# Altium PCB PCB1.PcbDoc
Units mil, origin at the board's own origin, x right, y up, seen from the top; angles counter-clockwise.
Board outline 6000 x 4000 mil, 2 copper layers (Top Layer, Bottom Layer); 6 components, 8 nets, 49 pads, 0 vias.
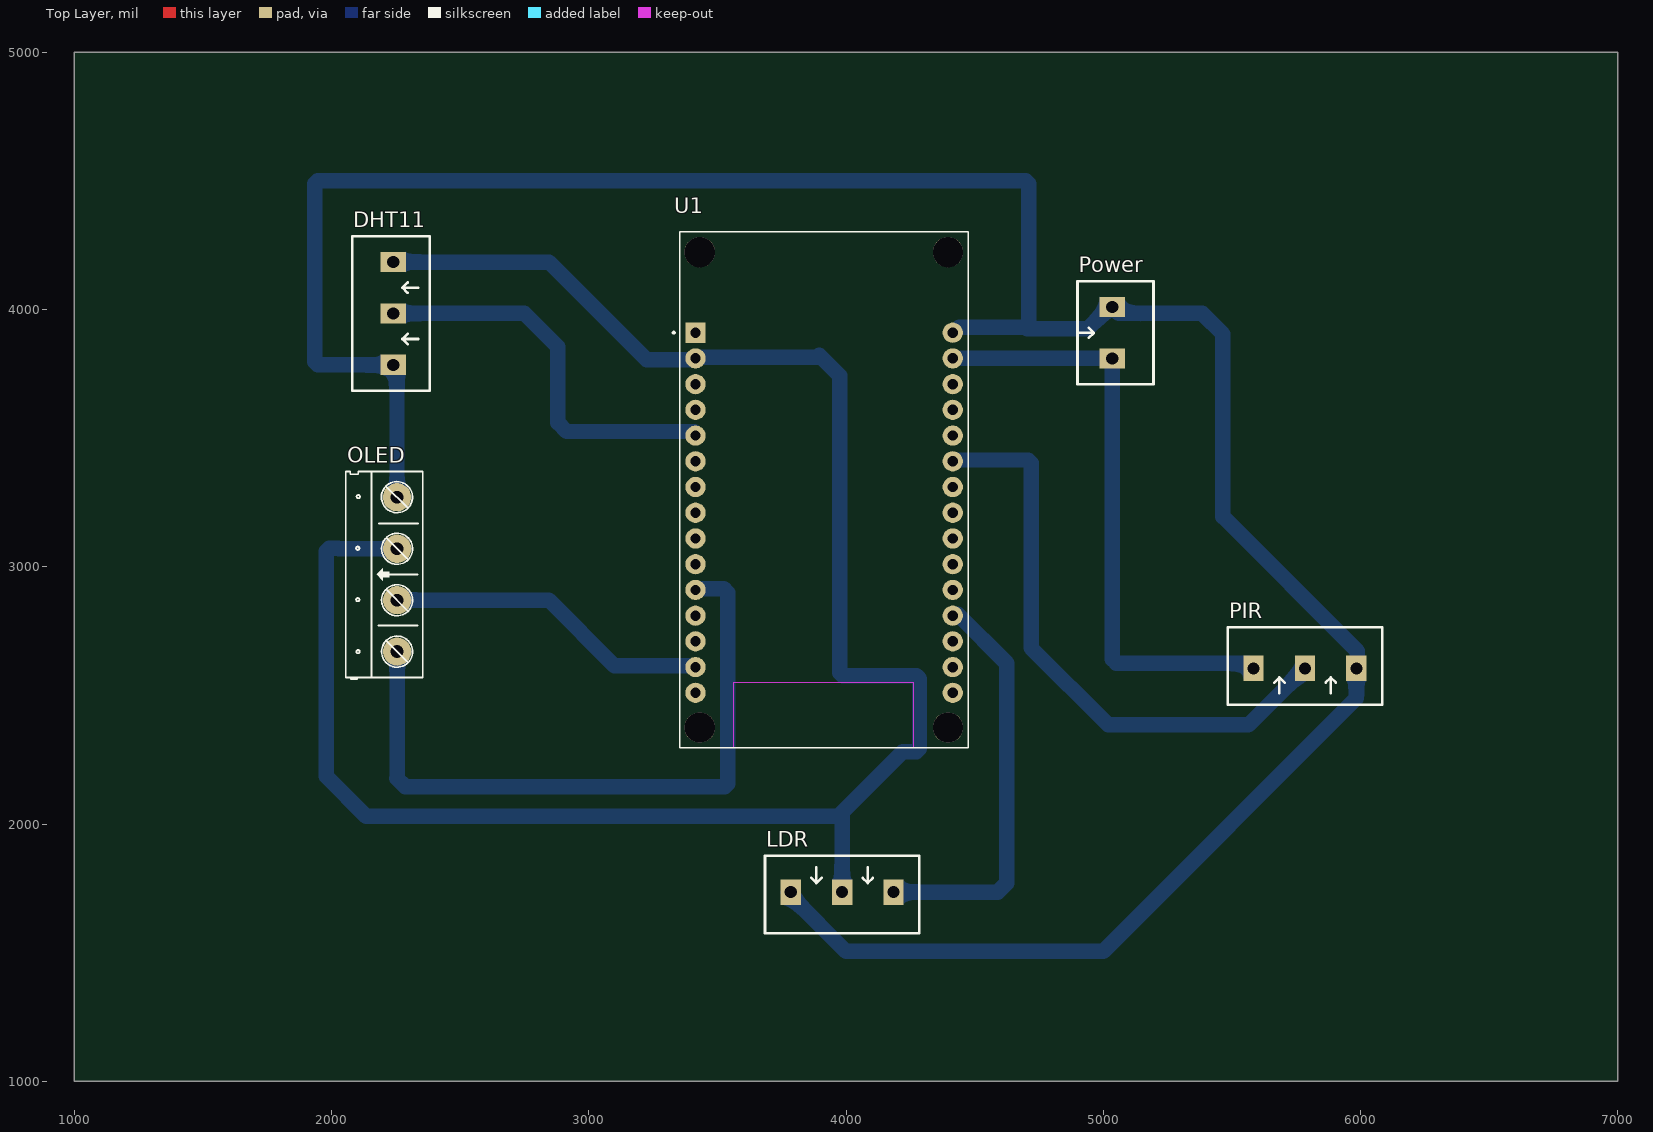
[diagram p0: Top Layer view]
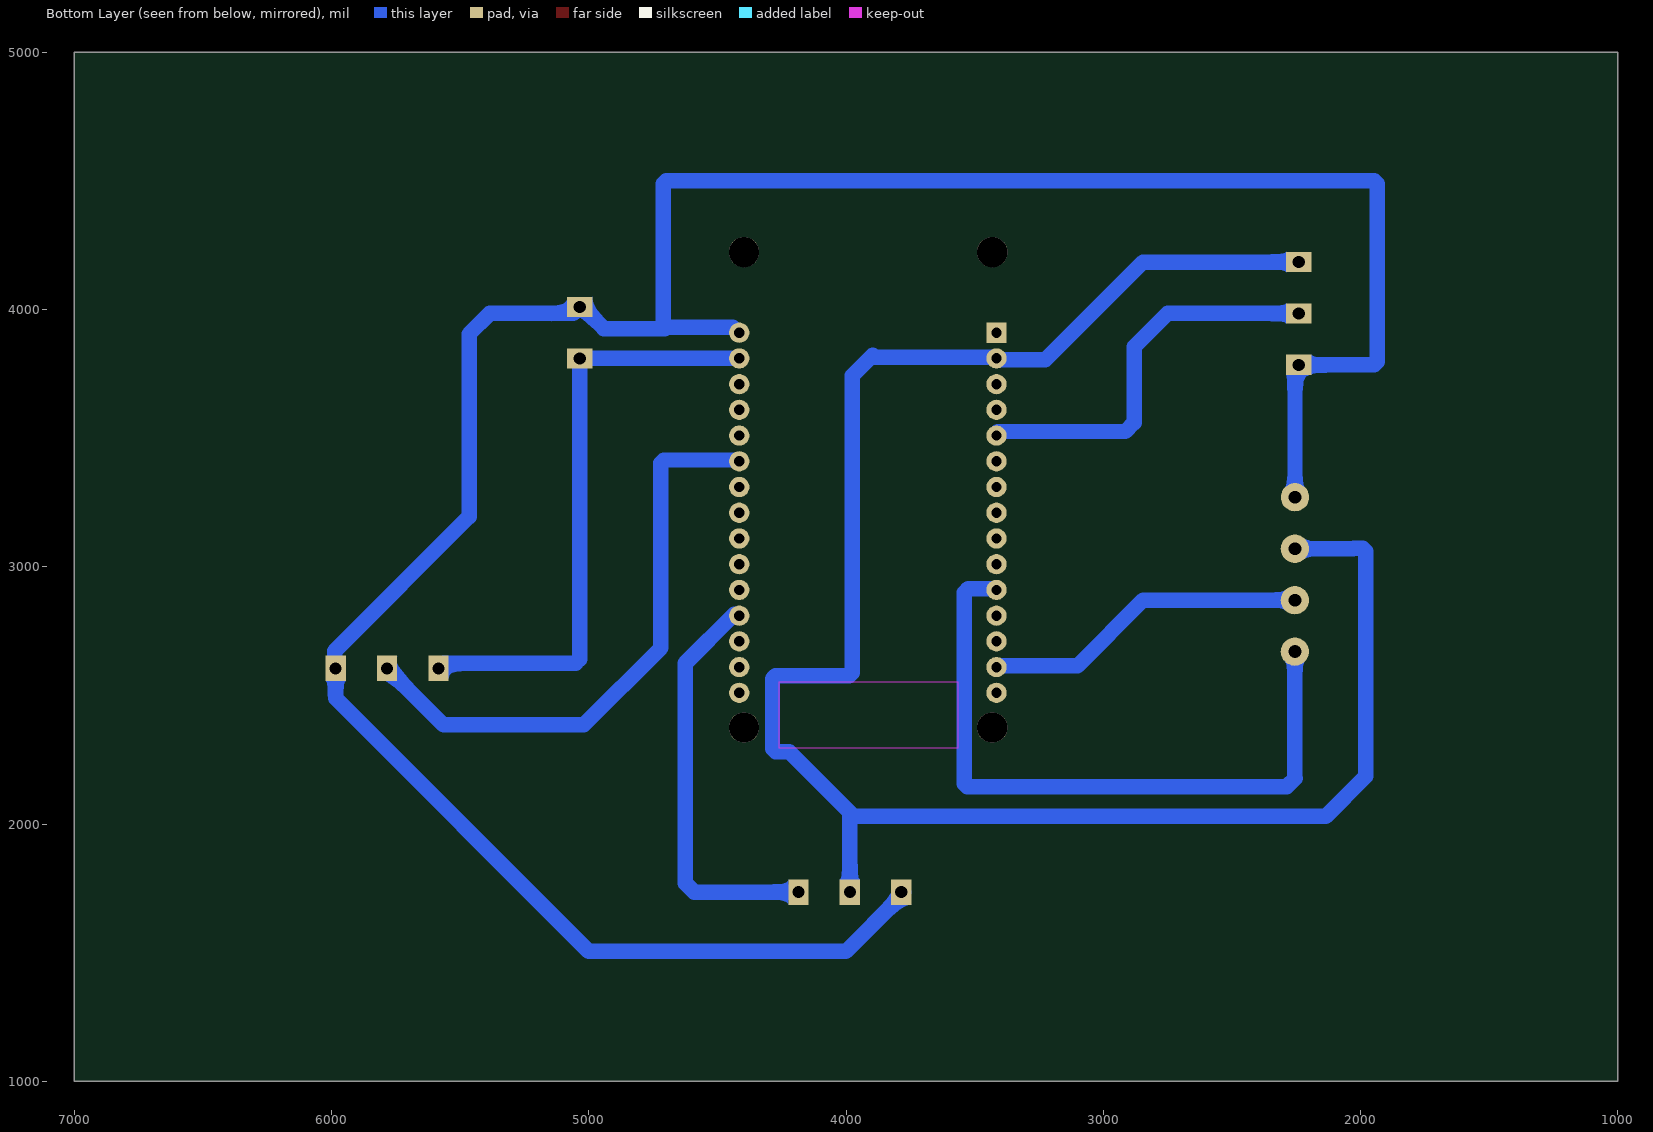
[diagram p1: Bottom Layer view, seen from below]
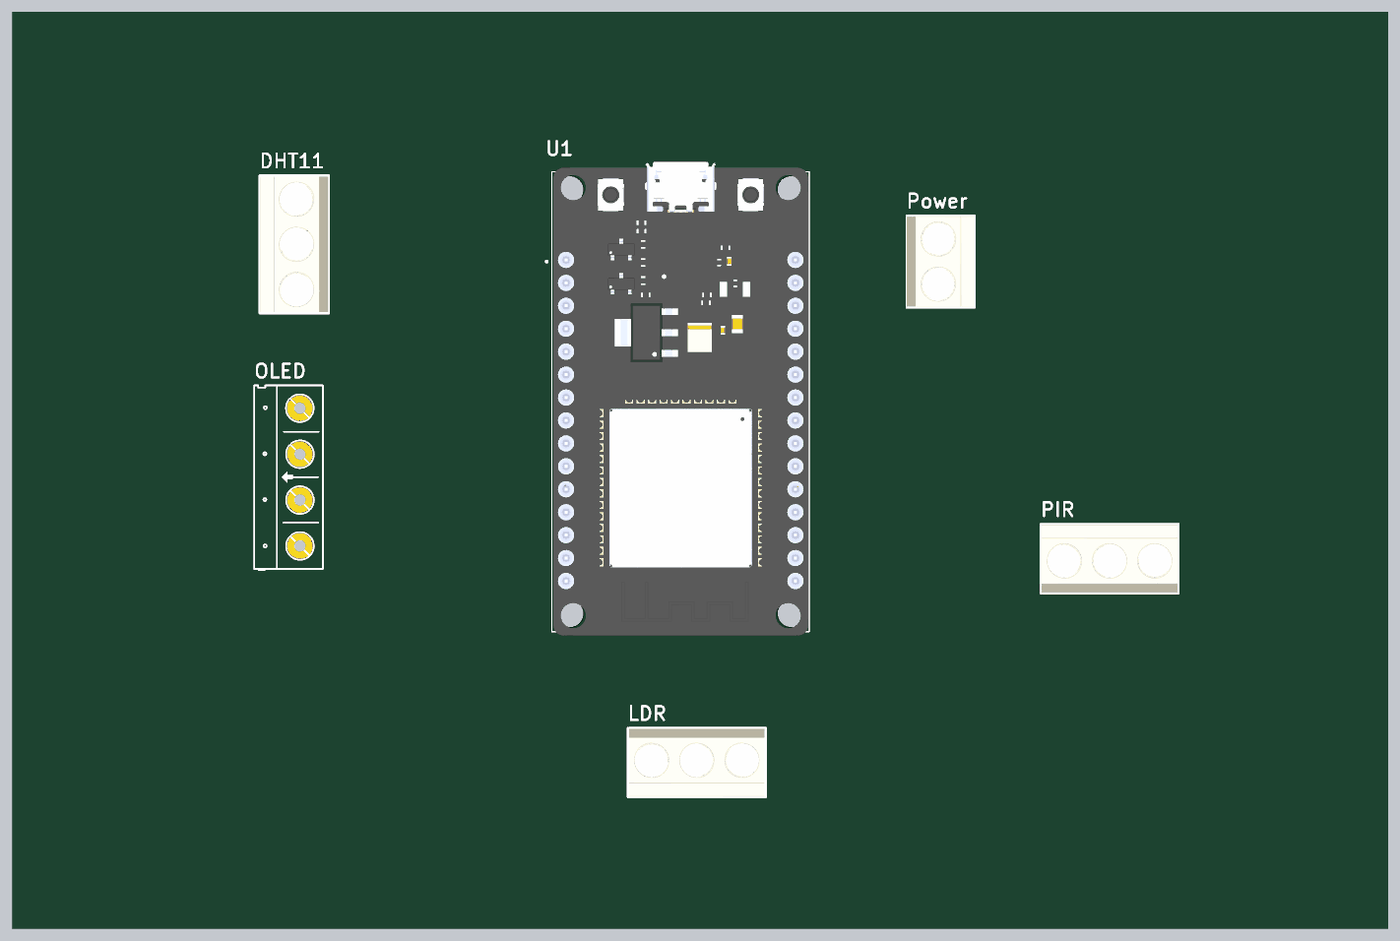
[diagram p2: 3D render of the assembled board from above, using the file's embedded part models]

## Layer stack, top to bottom
Top Solder: solder mask 0.4, Solder Resist, Dk 3.5
Top Layer: signal copper 1.4
Dielectric 1: dielectric 12.6, FR-4, Dk 4.8
Bottom Layer: signal copper 1.4
Bottom Solder: solder mask 0.4, Solder Resist, Dk 3.5

## Board outline
1000,1000 7000,1000 7000,5000 1000,5000

## Design rules (kind name [scope] priority, off if disabled: settings)
Clearance [All] p1: gap=10 ignorepadtopadclearanceinfootprint=FALSE
PolygonConnect [All] p1: connectstyle=Relief reliefconductorwidth=10 reliefentries=4 polygonreliefangle="90 Angle" airgapwidth=10
RoutingVias [All] p1: holewidth=28 width=50 viastyle="Through Hole" minholewidth=28 minwidth=50 maxholewidth=28 maxwidth=50
SolderMaskExpansion [All] p1: expansion=4 istentingtop=FALSE
Width [All] p1: maxlimit=20 minlimit=20 preferedwidth=20
30 further rules are at their usual default settings.

## Components (designator, comment, footprint, x,y, rotation, side; value= is the part's Value field where it differs from the comment)
DHT11 "Header 3 - M" "Medium - Header 3" 2240,3785 r90 top
LDR "Header 3 - M" "Medium - Header 3" 4185,1735 r180 top
OLED "Header 4" HED4 2255,2670 r90 top
PIR "Header 3 - M" "Medium - Header 3" 5584.5,2605 r0 top
Power "Header 2 - M" "Medium - Header 2" 5035,3910 r90 top
U1 "ESP32-DEVKIT-V1" MODULE_ESP32_DEVKIT_V1 3915,3299.17 r0 top

## Footprints (in the part's own frame and the unit in brackets; to place one, negate y for a bottom-side part, rotate by r counter-clockwise, add the part's x,y. Pads: shape width x height; smd on the part's side, far side on the other; paste and mask are expansions set on the pad)
HED4 [mil] "Header 4, 4 pin, hight 300mil, Pin to Pin 200, Colour Green"
  round 110 hole 50: 1(0,0) 2(200,0) 3(400.06,0.06) 4(600.39,0.39)
  silkscreen extent -106,-100 700,200
"Medium - Header 2" [mm]
  rect 2x2.5 hole 1.2: 1(-2.54,0) 2(2.54,0)
  silkscreen extent -5.08,-4.08 5.08,3.43, body extent -5,-4.07 5,3.43, height 10
"Medium - Header 3" [mm]
  rect 2x2.5 hole 1.2: 1(0,0) 2(5.08,0) 3(10.147,0)
  silkscreen extent -2.54,-3.58 12.7,4.06, body extent -2.42,-3.51 12.58,3.99, height 10
MODULE_ESP32_DEVKIT_V1 [mm]
  rect 2x2 / inner round 2 / far side rect 2x2 hole 1.02: 1(-12.7,15.515)
  round 2 hole 1.02: 2(-12.7,12.975) 3(-12.7,10.435) 4(-12.7,7.895) 5(-12.7,5.355) 6(-12.7,2.815) 7(-12.7,0.275) 8(-12.7,-2.265) 9(-12.7,-4.805) 10(-12.7,-7.345) 11(-12.7,-9.885) 12(-12.7,-12.425) 13(-12.7,-14.965) 14(-12.7,-17.505) 15(-12.7,-20.045) 16(12.7,-20.045) 17(12.7,-17.505) 18(12.7,-14.965) 19(12.7,-12.425) 20(12.7,-9.885) 21(12.7,-7.345) 22(12.7,-4.805) 23(12.7,-2.265) 24(12.7,0.275) 25(12.7,2.815) 26(12.7,5.355) 27(12.7,7.895) 28(12.7,10.435) 29(12.7,12.975) 30(12.7,15.515)
  round 3 hole 3 unplated: ""(-12.28,-23.475) ""(-12.28,23.475) ""(12.23,-23.475) ""(12.23,23.475)
  Keep-Out Layer region: 8.78,-25.475 -8.91,-25.475 -8.91,-18.985 8.78,-18.985
  Keep-Out Layer region: 8.78,-25.475 -8.91,-25.475 -8.91,-18.985 8.78,-18.985
  silkscreen extent -14.95,-25.48 14.23,25.48, body extent -14.1,-25.9 14.1,26.55, height 7.05

## Part data
DHT11 LDR PIR: "Header, 3-Pin, Medium", LatestRevisionDate=17-Jul-2002, LatestRevisionNote="Re-released for DXP Platform.", Publisher="Altium Limited"
OLED: library part Hed4, "Header 4 (Green)"
Power: "Header, 2-Pin, Medium", LatestRevisionDate=17-Jul-2002, LatestRevisionNote="Re-released for DXP Platform.", Publisher="Altium Limited"
U1: "Dual core, Wi-Fi: 2.4 GHz up to 150 Mbits/s,BLE (Bluetooth Low Energy) and legacy Bluetooth, 32 bits, Up to 240 MHz", Package=None, Check_prices=https://www.snapeda.com/parts/ESP32-DEVKIT-V1/Do+it/view-part/?ref=eda, MF="Do it", MP=ESP32-DEVKIT-V1, SnapEDA_Link=https://www.snapeda.com/parts/ESP32-DEVKIT-V1/Do+it/view-part/?ref=snap

## Nets (pads, with @x,y where several pads share a name; then routed paths per layer and width w, separated by ;. In a path a pad name is that pad's centre, name@x,y a point inside that pad or via, vN(x,y) a via of type N, cw(c..) or ccw(c..) an arc to the next point about the centre after c; other vN are vias at no path point)
NetDHT11_1: DHT11.1 LDR.3 OLED.4 PIR.3 Power.2 U1.30 | length 10361.2
  Bottom Layer w60: OLED.4 2254.61,3770.39 DHT11.1 1946.72,3785 1935,3796.72 1935,4488.28 1946.72,4500 4698.28,4500 4710,4488.28 4710,3930.83 ; LDR.3@3776.13,1735 3794.87,1716.26 3794.87,1710.63 4000.5,1505 5000,1505 5984,2489 PIR.3 5987.5,2608.5 5987.5,2672.5 5465,3195 5465,3905 5385,3985 5060,3985 Power.2 5025.16,4010 4940.98,3925.83 4705,3925.83 4710,3930.83 ; U1.30 4420.07,3910 4440.9,3930.83 4710,3930.83
NetDHT11_2: DHT11.2 U1.5 | length 1533
  Bottom Layer w60: DHT11.2 2750,3985 2880,3855 2880,3560 2914.17,3525.83 U1.5@3410,3525.83
NetDHT11_3: DHT11.3 LDR.2 OLED.3 U1.2 | length 7624.8
  Bottom Layer w60: DHT11.3@2234.5,4190 DHT11.3 2845.5,4184.5 3225,3805 3410,3805 3420,3815 3890,3815 3896.72,3821.72 3975,3743.43 3975,2588.45 3986.72,2576.73 4273.95,2576.73 4285.67,2565.02 4285.67,2292.94 4273.95,2281.22 4221.22,2281.22 3985,2045 3985,1985 LDR.2 ; OLED.3 2028.37,3070.06 2026.71,3071.72 1991.72,3071.72 1980,3060 1980,2185 2135,2030 3985,2030
NetLDR_1: LDR.1 U1.19 | length 1593.1
  Bottom Layer w60: LDR.1 4589.85,1735 4625,1770.15 4625,2625 4435,2815 U1.19@4420,2815
NetOLED_1: OLED.1 U1.11 | length 2669.4
  Bottom Layer w60: OLED.1 2255,2180 2253.28,2178.28 2286.57,2145 3528.28,2145 3540,2156.72 3540,2900 3525,2915 3420,2915 U1.11@3418.52,2916.48
NetOLED_2: OLED.2 U1.14 | length 1270.6
  Bottom Layer w60: OLED.2 2845,2870 3100,2615 U1.14@3420,2615
NetPIR_1: PIR.1 Power.1 U1.29 | length 2371.4
  Bottom Layer w10: Power.1@5019.17,3825.83 Power.1
  Bottom Layer w20: 5035,2640 5050,2625 ; PIR.1@5564.5,2625 PIR.1
  Bottom Layer w60: U1.29@4420,3810 Power.1 5035,2640 ; 5050,2625 PIR.1@5564.5,2625
NetPIR_2: PIR.2 U1.25 | length 2308.8
  Bottom Layer w20: 4708.28,3415 4720,3403.28 ; PIR.2@5745.29,2565.79 5755.13,2565.79 5784.5,2595.16 PIR.2
  Bottom Layer w60: U1.25@4420,3415 4708.28,3415 ; 4720,3403.28 4720,2685 5020,2385 5564.5,2385 PIR.2@5745.29,2565.79
pads on no net: U1. U1.1 U1.3 U1.4 U1.6 U1.7 U1.8 U1.9 U1.10 U1.12 U1.13 U1.15 U1.16 U1.17 U1.18 U1.20 U1.21 U1.22 U1.23 U1.24 U1.26 U1.27 U1.28